# Altium PCB 2led_v2.PcbDoc (part 1 of 2)
Units mm, origin at the board's own origin, x right, y up, seen from the top; angles counter-clockwise.
Board outline 100 x 100 mm, 2 copper layers (Top Layer, Bottom Layer); 180 components, 8 nets, 419 pads, 0 vias.
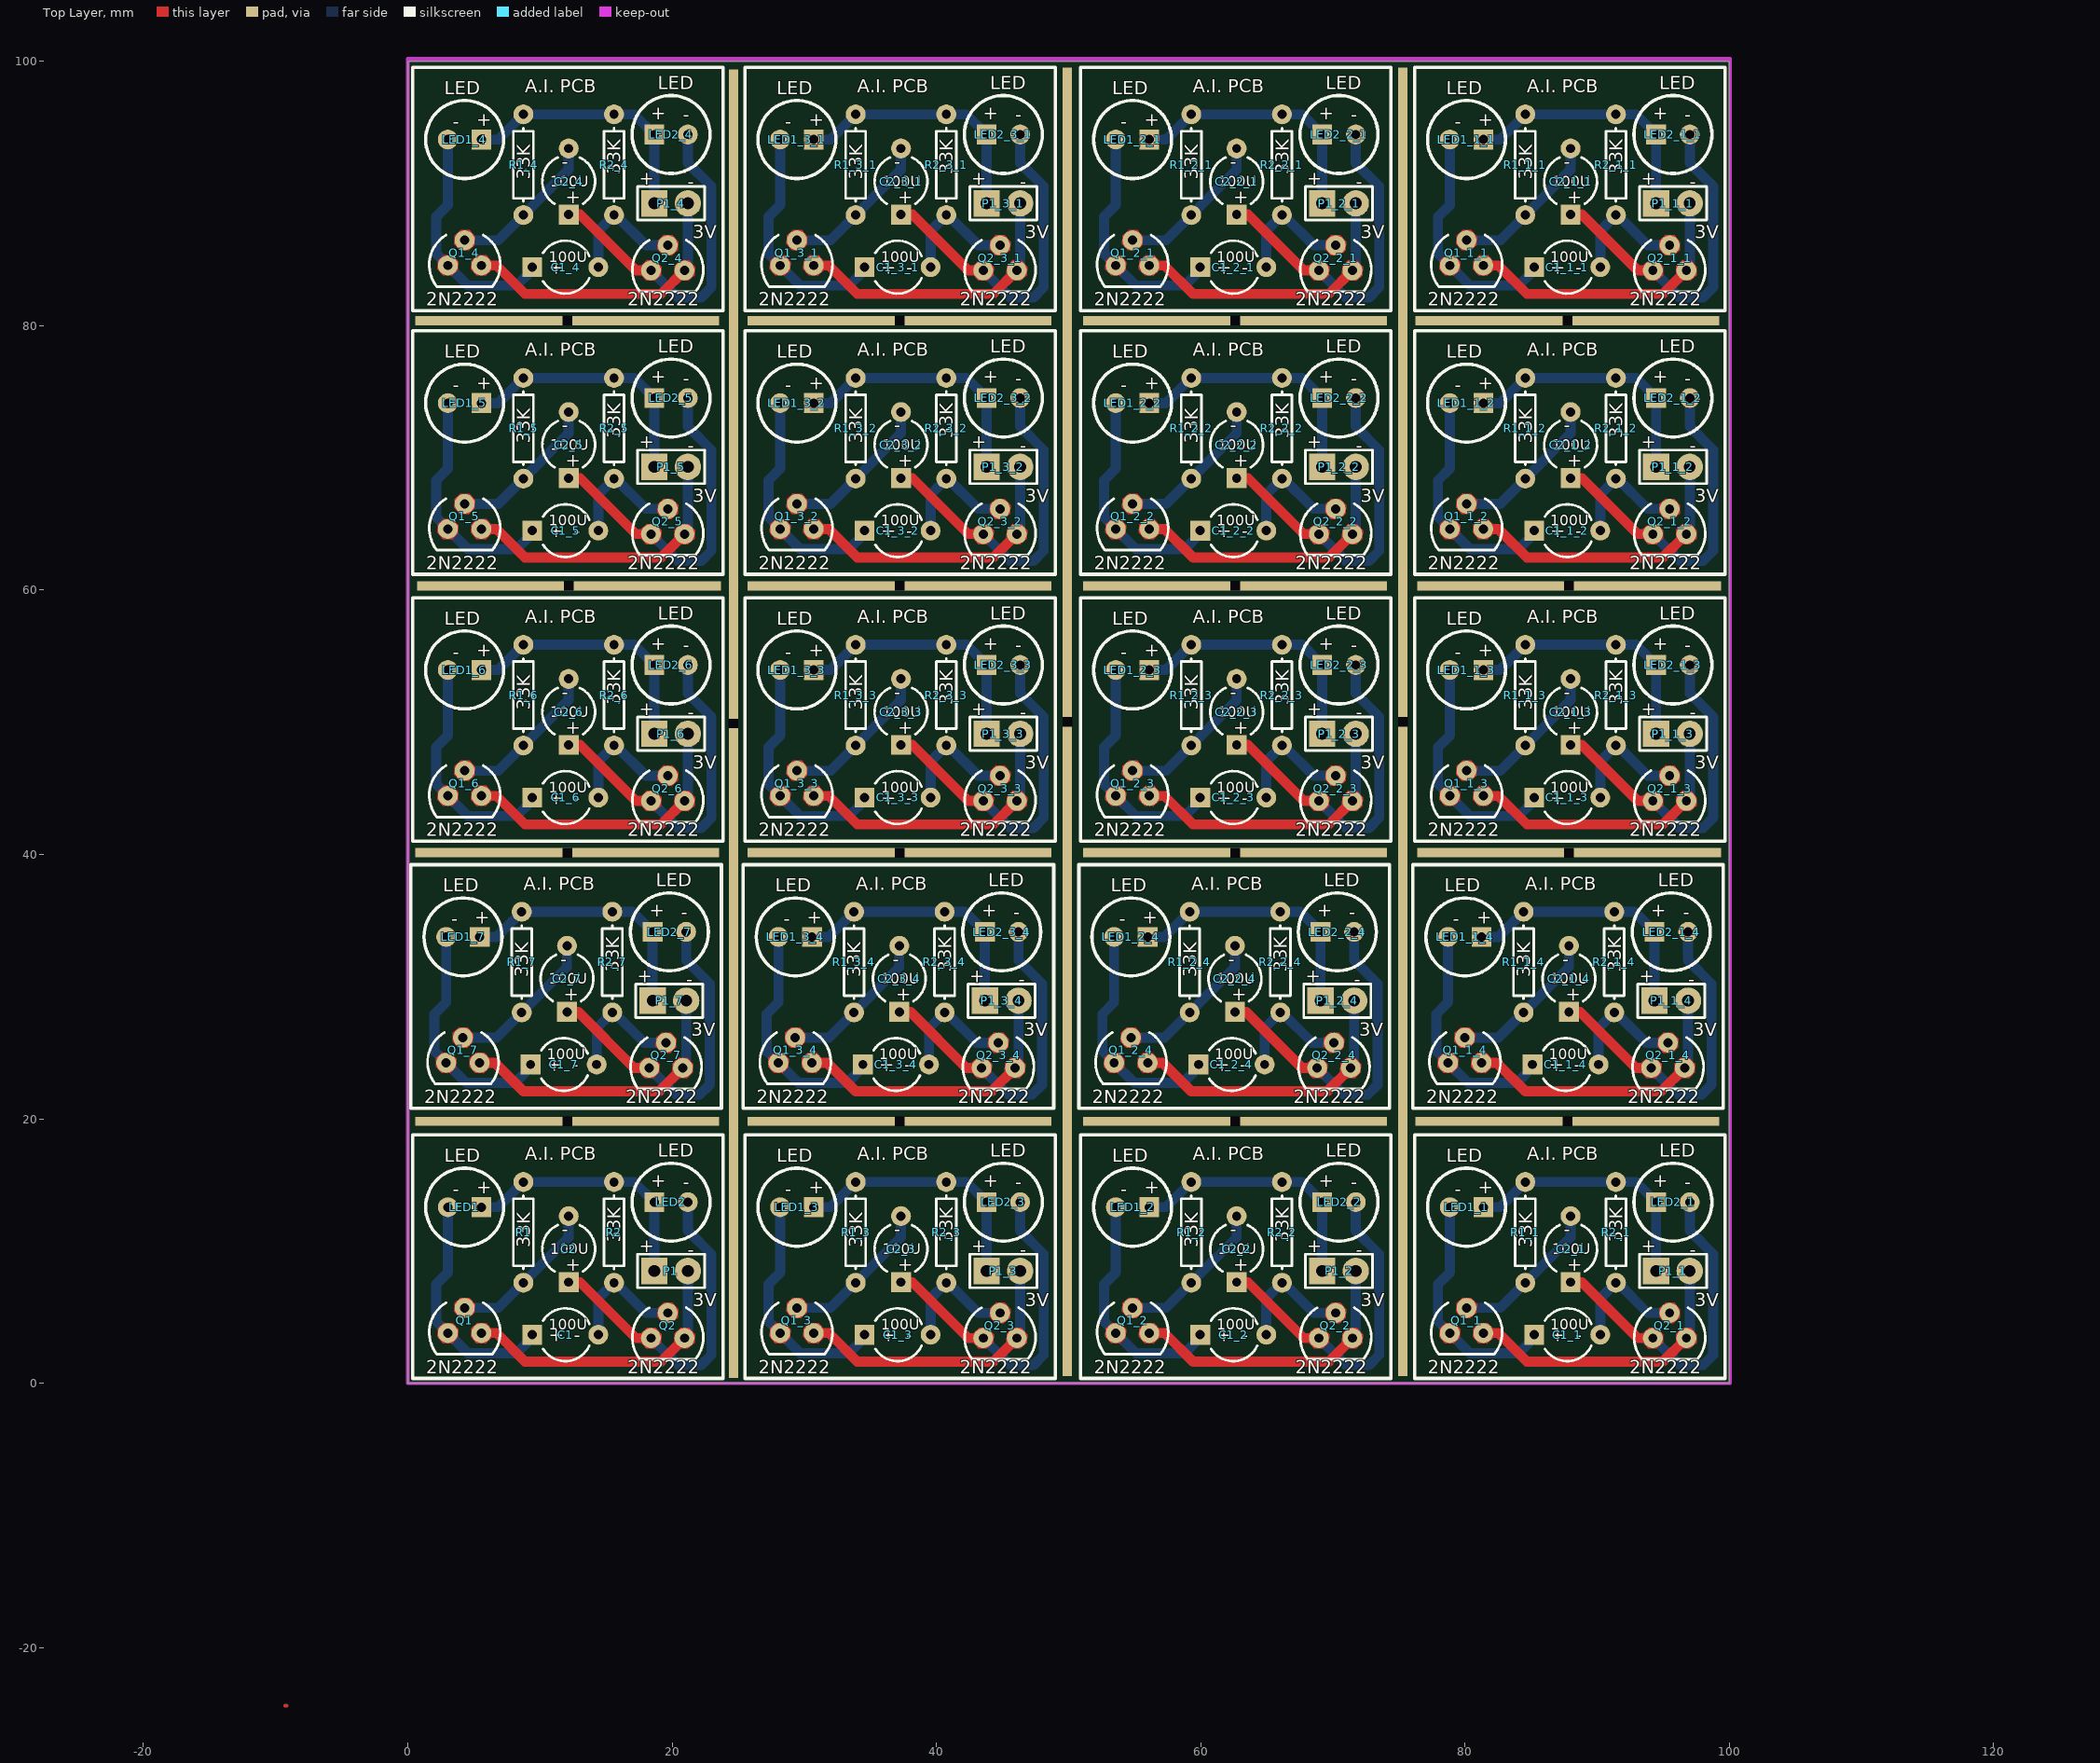
[diagram p0: Top Layer view]
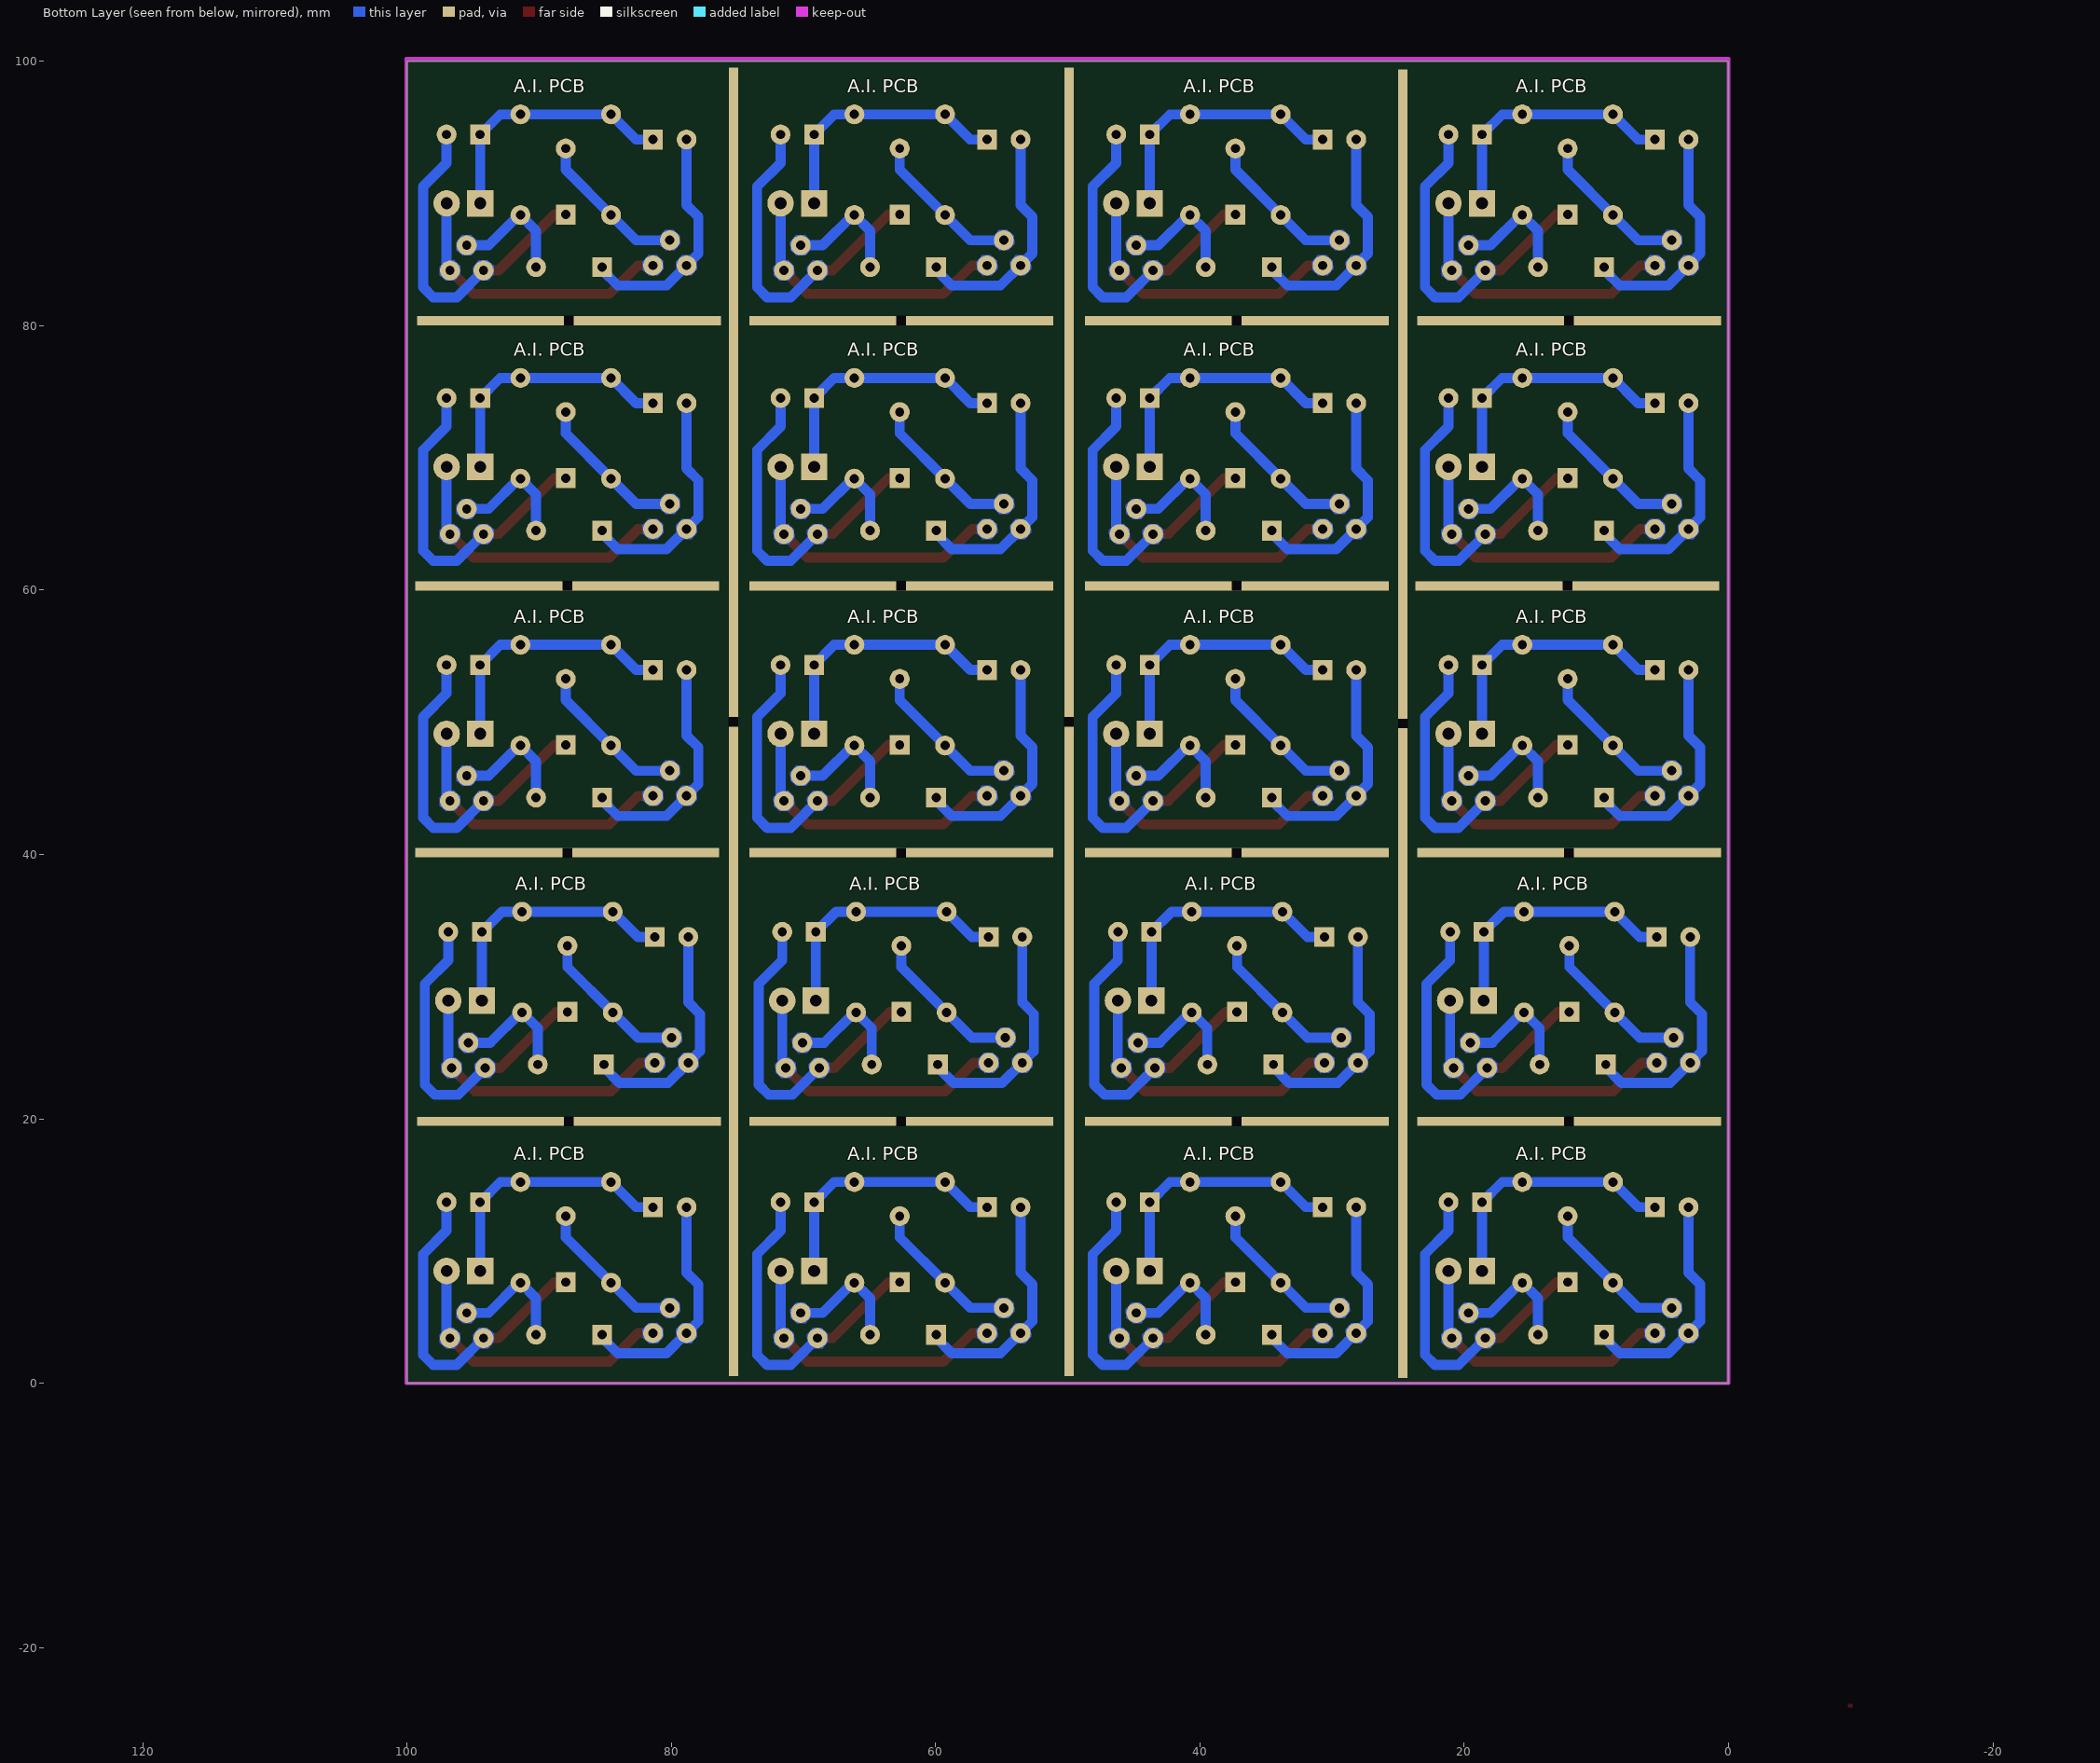
[diagram p1: Bottom Layer view, seen from below]

## Layer stack, top to bottom
Top Solder: solder mask 0.0102, Solder Resist, Dk 3.5
Top Layer: signal copper 0.0356
Dielectric 1: dielectric 0.32, FR-4, Dk 4.8
Bottom Layer: signal copper 0.0356
Bottom Solder: solder mask 0.0102, Solder Resist, Dk 3.5

## Board outline
0,0 0,100 100,100 100,0

## Design rules (kind name [scope] priority, off if disabled: settings)
Clearance [All] p1: gap=0.254 ignorepadtopadclearanceinfootprint=FALSE except(0: Arc-Hole Track-Hole SMDPad-Hole THPad-Hole Via-Hole Fill-Hole Poly-Hole Region-Hole Text-Hole)
PolygonConnect [All] p1: connectstyle=Relief reliefconductorwidth=0.254 reliefentries=4 polygonreliefangle="90 Angle" airgapwidth=0.254
RoutingVias [All] p1: holewidth=0.711 width=1.27 viastyle="Through Hole" minholewidth=0.711 minwidth=1.27 maxholewidth=0.711 maxwidth=1.27
SolderMaskExpansion [All] p1: expansion=0.102
Width [All] p1: maxlimit=0.762 minlimit=0.508 preferedwidth=0.762
30 further rules are at their usual default settings.

## Classes and differential pairs
component class Sheet1: C1 C2 LED1 LED2 P1 Q1 Q2 R1

## Components (designator, comment, footprint, x,y, rotation, side; value= is the part's Value field where it differs from the comment)
C1 "Cap1" CAPR5-4X5 11.922,3.667 r0 top value=100uF
C1_1 "Cap1" CAPR5-4X5 87.741,3.667 r0 top value=100uF (schematic designator C1)
C1_1_1 "Cap1" CAPR5-4X5 87.741,84.439 r0 top value=100uF (schematic designator C1)
C1_1_2 "Cap1" CAPR5-4X5 87.741,64.5 r0 top value=100uF (schematic designator C1)
C1_1_3 "Cap1" CAPR5-4X5 87.741,44.307 r0 top value=100uF (schematic designator C1)
C1_1_4 "Cap1" CAPR5-4X5 87.614,24.114 r0 top value=100uF (schematic designator C1)
C1_2 "Cap1" CAPR5-4X5 62.468,3.667 r0 top value=100uF (schematic designator C1)
C1_2_1 "Cap1" CAPR5-4X5 62.468,84.439 r0 top value=100uF (schematic designator C1)
C1_2_2 "Cap1" CAPR5-4X5 62.468,64.5 r0 top value=100uF (schematic designator C1)
C1_2_3 "Cap1" CAPR5-4X5 62.468,44.307 r0 top value=100uF (schematic designator C1)
C1_2_4 "Cap1" CAPR5-4X5 62.341,24.114 r0 top value=100uF (schematic designator C1)
C1_3 "Cap1" CAPR5-4X5 37.068,3.667 r0 top value=100uF (schematic designator C1)
C1_3_1 "Cap1" CAPR5-4X5 37.068,84.439 r0 top value=100uF (schematic designator C1)
C1_3_2 "Cap1" CAPR5-4X5 37.068,64.5 r0 top value=100uF (schematic designator C1)
C1_3_3 "Cap1" CAPR5-4X5 37.068,44.307 r0 top value=100uF (schematic designator C1)
C1_3_4 "Cap1" CAPR5-4X5 36.941,24.114 r0 top value=100uF (schematic designator C1)
C1_4 "Cap1" CAPR5-4X5 11.922,84.439 r0 top value=100uF (schematic designator C1)
C1_5 "Cap1" CAPR5-4X5 11.922,64.5 r0 top value=100uF (schematic designator C1)
C1_6 "Cap1" CAPR5-4X5 11.922,44.307 r0 top value=100uF (schematic designator C1)
C1_7 "Cap1" CAPR5-4X5 11.795,24.114 r0 top value=100uF (schematic designator C1)
C2 "Cap2" CAPR5-4X5 12.176,10.144 r90 top value=100uF
C2_1 "Cap2" CAPR5-4X5 87.995,10.144 r90 top value=100uF (schematic designator C2)
C2_1_1 "Cap2" CAPR5-4X5 87.995,90.916 r90 top value=100uF (schematic designator C2)
C2_1_2 "Cap2" CAPR5-4X5 87.995,70.977 r90 top value=100uF (schematic designator C2)
C2_1_3 "Cap2" CAPR5-4X5 87.995,50.784 r90 top value=100uF (schematic designator C2)
C2_1_4 "Cap2" CAPR5-4X5 87.868,30.591 r90 top value=100uF (schematic designator C2)
C2_2 "Cap2" CAPR5-4X5 62.722,10.144 r90 top value=100uF (schematic designator C2)
C2_2_1 "Cap2" CAPR5-4X5 62.722,90.916 r90 top value=100uF (schematic designator C2)
C2_2_2 "Cap2" CAPR5-4X5 62.722,70.977 r90 top value=100uF (schematic designator C2)
C2_2_3 "Cap2" CAPR5-4X5 62.722,50.784 r90 top value=100uF (schematic designator C2)
C2_2_4 "Cap2" CAPR5-4X5 62.595,30.591 r90 top value=100uF (schematic designator C2)
C2_3 "Cap2" CAPR5-4X5 37.322,10.144 r90 top value=100uF (schematic designator C2)
C2_3_1 "Cap2" CAPR5-4X5 37.322,90.916 r90 top value=100uF (schematic designator C2)
C2_3_2 "Cap2" CAPR5-4X5 37.322,70.977 r90 top value=100uF (schematic designator C2)
C2_3_3 "Cap2" CAPR5-4X5 37.322,50.784 r90 top value=100uF (schematic designator C2)
C2_3_4 "Cap2" CAPR5-4X5 37.195,30.591 r90 top value=100uF (schematic designator C2)
C2_4 "Cap2" CAPR5-4X5 12.176,90.916 r90 top value=100uF (schematic designator C2)
C2_5 "Cap2" CAPR5-4X5 12.176,70.977 r90 top value=100uF (schematic designator C2)
C2_6 "Cap2" CAPR5-4X5 12.176,50.784 r90 top value=100uF (schematic designator C2)
C2_7 "Cap2" CAPR5-4X5 12.049,30.591 r90 top value=100uF (schematic designator C2)
LED1 "L-53GD" L-53GD 4.302,13.319 r180 top
LED1_1 "L-53GD" L-53GD 80.121,13.319 r180 top (schematic designator LED1)
LED1_1_1 "L-53GD" L-53GD 80.121,94.091 r180 top (schematic designator LED1)
LED1_1_2 "L-53GD" L-53GD 80.121,74.152 r180 top (schematic designator LED1)
LED1_1_3 "L-53GD" L-53GD 80.121,53.959 r180 top (schematic designator LED1)
LED1_1_4 "L-53GD" L-53GD 79.994,33.766 r180 top (schematic designator LED1)
LED1_2 "L-53GD" L-53GD 54.848,13.319 r180 top (schematic designator LED1)
LED1_2_1 "L-53GD" L-53GD 54.848,94.091 r180 top (schematic designator LED1)
LED1_2_2 "L-53GD" L-53GD 54.848,74.152 r180 top (schematic designator LED1)
LED1_2_3 "L-53GD" L-53GD 54.848,53.959 r180 top (schematic designator LED1)
LED1_2_4 "L-53GD" L-53GD 54.721,33.766 r180 top (schematic designator LED1)
LED1_3 "L-53GD" L-53GD 29.448,13.319 r180 top (schematic designator LED1)
LED1_3_1 "L-53GD" L-53GD 29.448,94.091 r180 top (schematic designator LED1)
LED1_3_2 "L-53GD" L-53GD 29.448,74.152 r180 top (schematic designator LED1)
LED1_3_3 "L-53GD" L-53GD 29.448,53.959 r180 top (schematic designator LED1)
LED1_3_4 "L-53GD" L-53GD 29.321,33.766 r180 top (schematic designator LED1)
LED1_4 "L-53GD" L-53GD 4.302,94.091 r180 top (schematic designator LED1)
LED1_5 "L-53GD" L-53GD 4.302,74.152 r180 top (schematic designator LED1)
LED1_6 "L-53GD" L-53GD 4.302,53.959 r180 top (schematic designator LED1)
LED1_7 "L-53GD" L-53GD 4.175,33.766 r180 top (schematic designator LED1)
LED2 "L-53GD" L-53GD 19.923,13.7 r0 top
LED2_1 "L-53GD" L-53GD 95.742,13.7 r0 top (schematic designator LED2)
LED2_1_1 "L-53GD" L-53GD 95.742,94.472 r0 top (schematic designator LED2)
LED2_1_2 "L-53GD" L-53GD 95.742,74.533 r0 top (schematic designator LED2)
LED2_1_3 "L-53GD" L-53GD 95.742,54.34 r0 top (schematic designator LED2)
LED2_1_4 "L-53GD" L-53GD 95.615,34.147 r0 top (schematic designator LED2)
LED2_2 "L-53GD" L-53GD 70.469,13.7 r0 top (schematic designator LED2)
LED2_2_1 "L-53GD" L-53GD 70.469,94.472 r0 top (schematic designator LED2)
LED2_2_2 "L-53GD" L-53GD 70.469,74.533 r0 top (schematic designator LED2)
LED2_2_3 "L-53GD" L-53GD 70.469,54.34 r0 top (schematic designator LED2)
LED2_2_4 "L-53GD" L-53GD 70.342,34.147 r0 top (schematic designator LED2)
LED2_3 "L-53GD" L-53GD 45.069,13.7 r0 top (schematic designator LED2)
LED2_3_1 "L-53GD" L-53GD 45.069,94.472 r0 top (schematic designator LED2)
LED2_3_2 "L-53GD" L-53GD 45.069,74.533 r0 top (schematic designator LED2)
LED2_3_3 "L-53GD" L-53GD 45.069,54.34 r0 top (schematic designator LED2)
LED2_3_4 "L-53GD" L-53GD 44.942,34.147 r0 top (schematic designator LED2)
LED2_4 "L-53GD" L-53GD 19.923,94.472 r0 top (schematic designator LED2)
LED2_5 "L-53GD" L-53GD 19.923,74.533 r0 top (schematic designator LED2)
LED2_6 "L-53GD" L-53GD 19.923,54.34 r0 top (schematic designator LED2)
LED2_7 "L-53GD" L-53GD 19.796,34.147 r0 top (schematic designator LED2)
P1 "Header 2" HDR1X2 18.653,8.493 r0 top
P1_1 "Header 2" HDR1X2 94.472,8.493 r0 top (schematic designator P1)
P1_1_1 "Header 2" HDR1X2 94.472,89.265 r0 top (schematic designator P1)
P1_1_2 "Header 2" HDR1X2 94.472,69.326 r0 top (schematic designator P1)
P1_1_3 "Header 2" HDR1X2 94.472,49.133 r0 top (schematic designator P1)
P1_1_4 "Header 2" HDR1X2 94.345,28.94 r0 top (schematic designator P1)
P1_2 "Header 2" HDR1X2 69.199,8.493 r0 top (schematic designator P1)
P1_2_1 "Header 2" HDR1X2 69.199,89.265 r0 top (schematic designator P1)
P1_2_2 "Header 2" HDR1X2 69.199,69.326 r0 top (schematic designator P1)
P1_2_3 "Header 2" HDR1X2 69.199,49.133 r0 top (schematic designator P1)
P1_2_4 "Header 2" HDR1X2 69.072,28.94 r0 top (schematic designator P1)
P1_3 "Header 2" HDR1X2 43.799,8.493 r0 top (schematic designator P1)
P1_3_1 "Header 2" HDR1X2 43.799,89.265 r0 top (schematic designator P1)
P1_3_2 "Header 2" HDR1X2 43.799,69.326 r0 top (schematic designator P1)
P1_3_3 "Header 2" HDR1X2 43.799,49.133 r0 top (schematic designator P1)
P1_3_4 "Header 2" HDR1X2 43.672,28.94 r0 top (schematic designator P1)
P1_4 "Header 2" HDR1X2 18.653,89.265 r0 top (schematic designator P1)
P1_5 "Header 2" HDR1X2 18.653,69.326 r0 top (schematic designator P1)
P1_6 "Header 2" HDR1X2 18.653,49.133 r0 top (schematic designator P1)
P1_7 "Header 2" HDR1X2 18.526,28.94 r0 top (schematic designator P1)
Q1 "P2N2222A" *TO92 4.302,3.794 r0 top
Q1_1 "P2N2222A" *TO92 80.121,3.794 r0 top (schematic designator Q1)
Q1_1_1 "P2N2222A" *TO92 80.121,84.566 r0 top (schematic designator Q1)
Q1_1_2 "P2N2222A" *TO92 80.121,64.627 r0 top (schematic designator Q1)
Q1_1_3 "P2N2222A" *TO92 80.121,44.434 r0 top (schematic designator Q1)
Q1_1_4 "P2N2222A" *TO92 79.994,24.241 r0 top (schematic designator Q1)
Q1_2 "P2N2222A" *TO92 54.848,3.794 r0 top (schematic designator Q1)
Q1_2_1 "P2N2222A" *TO92 54.848,84.566 r0 top (schematic designator Q1)
Q1_2_2 "P2N2222A" *TO92 54.848,64.627 r0 top (schematic designator Q1)
Q1_2_3 "P2N2222A" *TO92 54.848,44.434 r0 top (schematic designator Q1)
Q1_2_4 "P2N2222A" *TO92 54.721,24.241 r0 top (schematic designator Q1)
Q1_3 "P2N2222A" *TO92 29.448,3.794 r0 top (schematic designator Q1)
Q1_3_1 "P2N2222A" *TO92 29.448,84.566 r0 top (schematic designator Q1)
Q1_3_2 "P2N2222A" *TO92 29.448,64.627 r0 top (schematic designator Q1)
Q1_3_3 "P2N2222A" *TO92 29.448,44.434 r0 top (schematic designator Q1)
Q1_3_4 "P2N2222A" *TO92 29.321,24.241 r0 top (schematic designator Q1)
Q1_4 "P2N2222A" *TO92 4.302,84.566 r0 top (schematic designator Q1)
Q1_5 "P2N2222A" *TO92 4.302,64.627 r0 top (schematic designator Q1)
Q1_6 "P2N2222A" *TO92 4.302,44.434 r0 top (schematic designator Q1)
Q1_7 "P2N2222A" *TO92 4.175,24.241 r0 top (schematic designator Q1)
Q2 "P2N2222A" *TO92 19.669,3.413 r0 top
Q2_1 "P2N2222A" *TO92 95.488,3.413 r0 top (schematic designator Q2)
Q2_1_1 "P2N2222A" *TO92 95.488,84.185 r0 top (schematic designator Q2)
Q2_1_2 "P2N2222A" *TO92 95.488,64.246 r0 top (schematic designator Q2)
Q2_1_3 "P2N2222A" *TO92 95.488,44.053 r0 top (schematic designator Q2)
Q2_1_4 "P2N2222A" *TO92 95.361,23.86 r0 top (schematic designator Q2)
Q2_2 "P2N2222A" *TO92 70.215,3.413 r0 top (schematic designator Q2)
Q2_2_1 "P2N2222A" *TO92 70.215,84.185 r0 top (schematic designator Q2)
Q2_2_2 "P2N2222A" *TO92 70.215,64.246 r0 top (schematic designator Q2)
Q2_2_3 "P2N2222A" *TO92 70.215,44.053 r0 top (schematic designator Q2)
Q2_2_4 "P2N2222A" *TO92 70.088,23.86 r0 top (schematic designator Q2)
Q2_3 "P2N2222A" *TO92 44.815,3.413 r0 top (schematic designator Q2)
Q2_3_1 "P2N2222A" *TO92 44.815,84.185 r0 top (schematic designator Q2)
Q2_3_2 "P2N2222A" *TO92 44.815,64.246 r0 top (schematic designator Q2)
Q2_3_3 "P2N2222A" *TO92 44.815,44.053 r0 top (schematic designator Q2)
Q2_3_4 "P2N2222A" *TO92 44.688,23.86 r0 top (schematic designator Q2)
Q2_4 "P2N2222A" *TO92 19.669,84.185 r0 top (schematic designator Q2)
Q2_5 "P2N2222A" *TO92 19.669,64.246 r0 top (schematic designator Q2)
Q2_6 "P2N2222A" *TO92 19.669,44.053 r0 top (schematic designator Q2)
Q2_7 "P2N2222A" *TO92 19.542,23.86 r0 top (schematic designator Q2)
R1 "Res1" AXIAL-0.3 8.747,11.414 r90 top value=33K
R1_1 "Res1" AXIAL-0.3 84.566,11.414 r90 top value=33K (schematic designator R1)
R1_1_1 "Res1" AXIAL-0.3 84.566,92.186 r90 top value=33K (schematic designator R1)
R1_1_2 "Res1" AXIAL-0.3 84.566,72.247 r90 top value=33K (schematic designator R1)
R1_1_3 "Res1" AXIAL-0.3 84.566,52.054 r90 top value=33K (schematic designator R1)
R1_1_4 "Res1" AXIAL-0.3 84.439,31.861 r90 top value=33K (schematic designator R1)
R1_2 "Res1" AXIAL-0.3 59.293,11.414 r90 top value=33K (schematic designator R1)
R1_2_1 "Res1" AXIAL-0.3 59.293,92.186 r90 top value=33K (schematic designator R1)
R1_2_2 "Res1" AXIAL-0.3 59.293,72.247 r90 top value=33K (schematic designator R1)
R1_2_3 "Res1" AXIAL-0.3 59.293,52.054 r90 top value=33K (schematic designator R1)
R1_2_4 "Res1" AXIAL-0.3 59.166,31.861 r90 top value=33K (schematic designator R1)
R1_3 "Res1" AXIAL-0.3 33.893,11.414 r90 top value=33K (schematic designator R1)
R1_3_1 "Res1" AXIAL-0.3 33.893,92.186 r90 top value=33K (schematic designator R1)
R1_3_2 "Res1" AXIAL-0.3 33.893,72.247 r90 top value=33K (schematic designator R1)
R1_3_3 "Res1" AXIAL-0.3 33.893,52.054 r90 top value=33K (schematic designator R1)
R1_3_4 "Res1" AXIAL-0.3 33.766,31.861 r90 top value=33K (schematic designator R1)
R1_4 "Res1" AXIAL-0.3 8.747,92.186 r90 top value=33K (schematic designator R1)
R1_5 "Res1" AXIAL-0.3 8.747,72.247 r90 top value=33K (schematic designator R1)
R1_6 "Res1" AXIAL-0.3 8.747,52.054 r90 top value=33K (schematic designator R1)
R1_7 "Res1" AXIAL-0.3 8.62,31.861 r90 top value=33K (schematic designator R1)
R2 "Res1" AXIAL-0.3 15.605,11.414 r90 top value=33K
R2_1 "Res1" AXIAL-0.3 91.424,11.414 r90 top value=33K (schematic designator R2)
R2_1_1 "Res1" AXIAL-0.3 91.424,92.186 r90 top value=33K (schematic designator R2)
R2_1_2 "Res1" AXIAL-0.3 91.424,72.247 r90 top value=33K (schematic designator R2)
R2_1_3 "Res1" AXIAL-0.3 91.424,52.054 r90 top value=33K (schematic designator R2)
R2_1_4 "Res1" AXIAL-0.3 91.297,31.861 r90 top value=33K (schematic designator R2)
R2_2 "Res1" AXIAL-0.3 66.151,11.414 r90 top value=33K (schematic designator R2)
R2_2_1 "Res1" AXIAL-0.3 66.151,92.186 r90 top value=33K (schematic designator R2)
R2_2_2 "Res1" AXIAL-0.3 66.151,72.247 r90 top value=33K (schematic designator R2)
R2_2_3 "Res1" AXIAL-0.3 66.151,52.054 r90 top value=33K (schematic designator R2)
R2_2_4 "Res1" AXIAL-0.3 66.024,31.861 r90 top value=33K (schematic designator R2)
R2_3 "Res1" AXIAL-0.3 40.751,11.414 r90 top value=33K (schematic designator R2)
R2_3_1 "Res1" AXIAL-0.3 40.751,92.186 r90 top value=33K (schematic designator R2)
R2_3_2 "Res1" AXIAL-0.3 40.751,72.247 r90 top value=33K (schematic designator R2)
R2_3_3 "Res1" AXIAL-0.3 40.751,52.054 r90 top value=33K (schematic designator R2)
R2_3_4 "Res1" AXIAL-0.3 40.624,31.861 r90 top value=33K (schematic designator R2)
R2_4 "Res1" AXIAL-0.3 15.605,92.186 r90 top value=33K (schematic designator R2)
R2_5 "Res1" AXIAL-0.3 15.605,72.247 r90 top value=33K (schematic designator R2)
R2_6 "Res1" AXIAL-0.3 15.605,52.054 r90 top value=33K (schematic designator R2)
R2_7 "Res1" AXIAL-0.3 15.478,31.861 r90 top value=33K (schematic designator R2)

## Footprints (in the part's own frame and the unit in brackets; to place one, negate y for a bottom-side part, rotate by r counter-clockwise, add the part's x,y. Pads: shape width x height; smd on the part's side, far side on the other; paste and mask are expansions set on the pad)
*TO92 [mm]
  round 1.5 hole 0.7: 1(1.27,0) 2(0,1.905) 3(-1.27,0)
  Top Layer region: 2.058,0.287 1.624,0.76 0.983,0.788 0.51,0.354 0.482,-0.287 0.916,-0.76 1.557,-0.788 2.03,-0.354
  Top Layer region: 0.788,2.192 0.354,2.665 -0.287,2.693 -0.76,2.259 -0.788,1.618 -0.354,1.145 0.287,1.117 0.76,1.551
  Top Layer region: -0.482,0.287 -0.916,0.76 -1.557,0.788 -2.03,0.354 -2.058,-0.287 -1.624,-0.76 -0.983,-0.788 -0.51,-0.354
  Bottom Layer region: 2.058,0.287 1.624,0.76 0.983,0.788 0.51,0.354 0.482,-0.287 0.916,-0.76 1.557,-0.788 2.03,-0.354
  Bottom Layer region: 0.788,2.192 0.354,2.665 -0.287,2.693 -0.76,2.259 -0.788,1.618 -0.354,1.145 0.287,1.117 0.76,1.551
  Bottom Layer region: -0.482,0.287 -0.916,0.76 -1.557,0.788 -2.03,0.354 -2.058,-0.287 -1.624,-0.76 -0.983,-0.788 -0.51,-0.354
  Multi-Layer region: 2.058,0.287 1.624,0.76 0.983,0.788 0.51,0.354 0.482,-0.287 0.916,-0.76 1.557,-0.788 2.03,-0.354
  Multi-Layer region: 0.788,2.192 0.354,2.665 -0.287,2.693 -0.76,2.259 -0.788,1.618 -0.354,1.145 0.287,1.117 0.76,1.551
  Multi-Layer region: -0.482,0.287 -0.916,0.76 -1.557,0.788 -2.03,0.354 -2.058,-0.287 -1.624,-0.76 -0.983,-0.788 -0.51,-0.354
  silkscreen extent -2.68,-1.61 2.7,2.3
AXIAL-0.3 [mm] "Axial Device, Thru-Hole; 2 Leads; 0.3 in Pin Spacing"
  round 1.5 hole 0.7: 1(-3.81,0) 2(3.81,0)
  silkscreen extent -2.77,-0.76 2.77,0.76
CAPR5-4X5 [mm] "Capacitor; 2 Leads"
  rect 1.5x1.5 hole 0.7: 1(-2.5,0)
  round 1.5 hole 0.7: 2(2.5,0)
  silkscreen extent -1.69,-2 1.82,2
HDR1X2 [mm] "Connector; Header; 2 Position"
  rect 2x2 hole 0.9: 1(0,0)
  round 2 hole 0.9: 2(2.54,0)
  silkscreen extent -1.27,-1.27 3.81,1.27
L-53GD [mm]
  rect 1.5x1.5 hole 0.7: 1(-1.27,0)
  round 1.5 hole 0.7: 2(1.27,0)
  silkscreen extent -2.95,-2.95 2.95,2.95

## Part data
C1 C1_1 C1_1_1 C1_1_2 C1_1_3 C1_1_4 C1_2 C1_2_1 C1_2_2 C1_2_3 C1_2_4 C1_3 C1_3_1 C1_3_2 C1_3_3 C1_3_4 C1_4 C1_5 C1_6 C1_7: library part Cap2, "Capacitor", PackageDescription="Capacitor; 2 Leads", PackageReference=CAPR5-4X5, Published=23-Sep-2002, Publisher="Altium Limited"
C2 C2_1 C2_1_1 C2_1_2 C2_1_3 C2_1_4 C2_2 C2_2_1 C2_2_2 C2_2_3 C2_2_4 C2_3 C2_3_1 C2_3_2 C2_3_3 C2_3_4 C2_4 C2_5 C2_6 C2_7: "Capacitor", PackageDescription="Capacitor; 2 Leads", PackageReference=CAPR5-4X5, Published=23-Sep-2002, Publisher="Altium Limited"
LED1 LED1_1 LED1_1_1 LED1_1_2 LED1_1_3 LED1_1_4 LED1_2 LED1_2_1 LED1_2_2 LED1_2_3 LED1_2_4 LED1_3 LED1_3_1 LED1_3_2 LED1_3_3 LED1_3_4 LED1_4 LED1_5 LED1_6 LED1_7 LED2 LED2_1 LED2_1_1 LED2_1_2 LED2_1_3 LED2_1_4 LED2_2 LED2_2_1 LED2_2_2 LED2_2_3 LED2_2_4 LED2_3 LED2_3_1 LED2_3_2 LED2_3_3 LED2_3_4 LED2_4 LED2_5 LED2_6 LED2_7: "LED", Manufacturer_Name=Kingbright, Mouser Part Number=N/A, RS Part Number=2286004A, Allied_Number=70424261, Allied Price/Stock=http://www.alliedelec.com/kingbright-l-53gd/70424261/, Datasheet Link=http://docs-emea.rs-online.com/webdocs/151e/0900766b8151e408.pdf, Manufacturer_Part_Number=L-53GD, Mouser Price/Stock=https://www.mouser.com/Search/Refine.aspx?Keyword=N%2FA, RS Price/Stock=http://uk.rs-online.com/web/p/products/2286004A
P1 P1_1 P1_1_1 P1_1_2 P1_1_3 P1_1_4 P1_2 P1_2_1 P1_2_2 P1_2_3 P1_2_4 P1_3 P1_3_1 P1_3_2 P1_3_3 P1_3_4 P1_4 P1_5 P1_6 P1_7: "Header, 2-Pin", LatestRevisionDate=17-Jul-2002, LatestRevisionNote="Re-released for DXP Platform.", Publisher="Altium Limited"
Q1 Q1_1 Q1_1_1 Q1_1_2 Q1_1_3 Q1_1_4 Q1_2 Q1_2_1 Q1_2_2 Q1_2_3 Q1_2_4 Q1_3 Q1_3_1 Q1_3_2 Q1_3_3 Q1_3_4 Q1_4 Q1_5 Q1_6 Q1_7 Q2 Q2_1 Q2_1_1 Q2_1_2 Q2_1_3 Q2_1_4 Q2_2 Q2_2_1 Q2_2_2 Q2_2_3 Q2_2_4 Q2_3 Q2_3_1 Q2_3_2 Q2_3_3 Q2_3_4 Q2_4 Q2_5 Q2_6 Q2_7: Package="TO-92 NXP Semiconductors", Availability=Unavailable, MF="ON Semiconductor", MP=P2N2222A, Price=None, SnapEDA_Link=https://www.snapeda.com/parts/P2N2222A/ON%20Semiconductor/view-part/?ref=snap
R1 R1_1 R1_1_1 R1_1_2 R1_1_3 R1_1_4 R1_2 R1_2_1 R1_2_2 R1_2_3 R1_2_4 R1_3 R1_3_1 R1_3_2 R1_3_3 R1_3_4 R1_4 R1_5 R1_6 R1_7 R2 R2_1 R2_1_1 R2_1_2 R2_1_3 R2_1_4 R2_2 R2_2_1 R2_2_2 R2_2_3 R2_2_4 R2_3 R2_3_1 R2_3_2 R2_3_3 R2_3_4 R2_4 R2_5 R2_6 R2_7: "Resistor", LatestRevisionDate=17-Jul-2002, LatestRevisionNote="Re-released for DXP Platform.", PackageDescription="Axial Device, Thru-Hole; 2 Leads; 0.3 in Pin Spacing", PackageReference=AXIAL-0.3, Published=8-Jun-2000, Publisher="Altium Limited"

## Free pads (board coordinates)
  rect 0.7x99 hole 0.7 square: 7(24.638,49.911) 7(49.911,50.038) 7(75.311,50.038)
  rect 23x0.7 hole 0.7 square: 8(12.065,19.812) 8(12.065,40.132) 8(12.065,80.391) 8(12.192,60.325) 8(37.211,19.812) 8(37.211,40.132) 8(37.211,60.325) 8(37.211,80.391) 8(62.611,19.812) 8(62.611,40.132) 8(62.611,60.325) 8(62.611,80.391) 8(87.757,19.812) 8(87.757,80.391) 8(87.884,40.132) 8(87.884,60.325)

## Nets (pads, with @x,y where several pads share a name; then routed paths per layer and width w, separated by ;. In a path a pad name is that pad's centre, name@x,y a point inside that pad or via, vN(x,y) a via of type N, cw(c..) or ccw(c..) an arc to the next point about the centre after c; other vN are vias at no path point)
NetC1_1: C1.1 LED1.2 Q1.3 | length 18
  Bottom Layer w0.762: LED1.2@3.032,13.319 3.032,8.366 2.143,7.477 2.143,4.683 Q1.3@3.032,3.794 4.556,2.27 8.239,2.27 9.422,3.453 C1.1@9.422,3.667
NetC1_2: C1.2 Q2.2 R2.1 | length 9.4
  Bottom Layer w0.762: C1.2@14.422,3.667 14.422,6.421 R2.1@15.605,7.604 15.732,7.604 18.018,5.318 Q2.2@19.669,5.318
NetC2_1: C2.1 LED2.2 Q2.3 | length 26
  Top Layer w0.762: C2.1@12.176,7.644 13.025,7.644 17.256,3.413 Q2.3@18.399,3.413
  Bottom Layer w0.762: Q2.3@18.399,3.413 20.431,1.381 22.209,1.381 22.971,2.143 22.971,9.763 21.193,11.541 LED2.2@21.193,13.7
NetC2_2: C2.2 Q1.2 R1.1 | length 11.7
  Bottom Layer w0.762: Q1.2@4.302,5.699 6.842,5.699 R1.1@8.747,7.604 12.176,11.033 C2.2@12.176,12.644
NetLED1_1: LED1.1 LED2.1 P1.1 R1.2 R2.2 | length 19.7
  Bottom Layer w0.762: LED1.1@5.572,13.319 6.842,13.319 R1.2@8.747,15.224 R2.2@15.605,15.224 17.129,15.224 LED2.1@18.653,13.7 P1.1@18.653,8.493
NetLED4_1: 
NetLED4_2: 
NetP1_2: P1.2 Q1.1 Q2.1 | length 22.2
  Top Layer w0.762: Q1.1@5.572,3.794 6.715,3.794 8.874,1.635 19.161,1.635 Q2.1@20.939,3.413
  Bottom Layer w0.762: Q2.1@20.939,3.413 21.193,3.667 P1.2@21.193,8.493
pads on no net: C1_1.1 C1_1.2 C1_1_1.1 C1_1_1.2 C1_1_2.1 C1_1_2.2 C1_1_3.1 C1_1_3.2 C1_1_4.1 C1_1_4.2 C1_2.1 C1_2.2 C1_2_1.1 C1_2_1.2 C1_2_2.1 C1_2_2.2 C1_2_3.1 C1_2_3.2 C1_2_4.1 C1_2_4.2 C1_3.1 C1_3.2 C1_3_1.1 C1_3_1.2 C1_3_2.1 C1_3_2.2 C1_3_3.1 C1_3_3.2 C1_3_4.1 C1_3_4.2 C1_4.1 C1_4.2 C1_5.1 C1_5.2 C1_6.1 C1_6.2 C1_7.1 C1_7.2 C2_1.1 C2_1.2 C2_1_1.1 C2_1_1.2 C2_1_2.1 C2_1_2.2 C2_1_3.1 C2_1_3.2 C2_1_4.1 C2_1_4.2 C2_2.1 C2_2.2 C2_2_1.1 C2_2_1.2 C2_2_2.1 C2_2_2.2 C2_2_3.1 C2_2_3.2 C2_2_4.1 C2_2_4.2 C2_3.1 C2_3.2 C2_3_1.1 C2_3_1.2 C2_3_2.1 C2_3_2.2 C2_3_3.1 C2_3_3.2 C2_3_4.1 C2_3_4.2 C2_4.1 C2_4.2 C2_5.1 C2_5.2 C2_6.1 C2_6.2 C2_7.1 C2_7.2 LED1_1.1 LED1_1.2 LED1_1_1.1 LED1_1_1.2 LED1_1_2.1 LED1_1_2.2 LED1_1_3.1 LED1_1_3.2 LED1_1_4.1 LED1_1_4.2 LED1_2.1 LED1_2.2 LED1_2_1.1 LED1_2_1.2 LED1_2_2.1 LED1_2_2.2 LED1_2_3.1 LED1_2_3.2 LED1_2_4.1 LED1_2_4.2 LED1_3.1 LED1_3.2 LED1_3_1.1 LED1_3_1.2 LED1_3_2.1 LED1_3_2.2 LED1_3_3.1 LED1_3_3.2 LED1_3_4.1 LED1_3_4.2 LED1_4.1 LED1_4.2 LED1_5.1 LED1_5.2 LED1_6.1 LED1_6.2 LED1_7.1 LED1_7.2 LED2_1.1 LED2_1.2 LED2_1_1.1 LED2_1_1.2 LED2_1_2.1 LED2_1_2.2 LED2_1_3.1 LED2_1_3.2 LED2_1_4.1 LED2_1_4.2 LED2_2.1 LED2_2.2 LED2_2_1.1 LED2_2_1.2 LED2_2_2.1 LED2_2_2.2 LED2_2_3.1 LED2_2_3.2 LED2_2_4.1 LED2_2_4.2 LED2_3.1 LED2_3.2 LED2_3_1.1 LED2_3_1.2 LED2_3_2.1 LED2_3_2.2 LED2_3_3.1 LED2_3_3.2 LED2_3_4.1 LED2_3_4.2 LED2_4.1 LED2_4.2 LED2_5.1 LED2_5.2 LED2_6.1 LED2_6.2 LED2_7.1 LED2_7.2 P1_1.1 P1_1.2 P1_1_1.1 P1_1_1.2 P1_1_2.1 P1_1_2.2 P1_1_3.1 P1_1_3.2 P1_1_4.1 P1_1_4.2 P1_2.1 P1_2.2 P1_2_1.1 P1_2_1.2 P1_2_2.1 P1_2_2.2 P1_2_3.1 P1_2_3.2 P1_2_4.1 P1_2_4.2 P1_3.1 P1_3.2 P1_3_1.1 P1_3_1.2 P1_3_2.1 P1_3_2.2 P1_3_3.1 P1_3_3.2 P1_3_4.1 P1_3_4.2 P1_4.1 P1_4.2 P1_5.1 P1_5.2 P1_6.1 P1_6.2 P1_7.1 P1_7.2 Q1_1.1 Q1_1.2 Q1_1.3 Q1_1_1.1 Q1_1_1.2 Q1_1_1.3 Q1_1_2.1 Q1_1_2.2 Q1_1_2.3 Q1_1_3.1 Q1_1_3.2 Q1_1_3.3 Q1_1_4.1 Q1_1_4.2 Q1_1_4.3 Q1_2.1 Q1_2.2 Q1_2.3 Q1_2_1.1 Q1_2_1.2 Q1_2_1.3 Q1_2_2.1 Q1_2_2.2 Q1_2_2.3 Q1_2_3.1 Q1_2_3.2 Q1_2_3.3 Q1_2_4.1 Q1_2_4.2 Q1_2_4.3 Q1_3.1 Q1_3.2 Q1_3.3 Q1_3_1.1 Q1_3_1.2 Q1_3_1.3 Q1_3_2.1 Q1_3_2.2 Q1_3_2.3 Q1_3_3.1 Q1_3_3.2 Q1_3_3.3 Q1_3_4.1 Q1_3_4.2 Q1_3_4.3 Q1_4.1 Q1_4.2 Q1_4.3 Q1_5.1 Q1_5.2 Q1_5.3 Q1_6.1 Q1_6.2 Q1_6.3 Q1_7.1 Q1_7.2 Q1_7.3 Q2_1.1 Q2_1.2 Q2_1.3 Q2_1_1.1 Q2_1_1.2 Q2_1_1.3 Q2_1_2.1 Q2_1_2.2 Q2_1_2.3 Q2_1_3.1 Q2_1_3.2 Q2_1_3.3 Q2_1_4.1 Q2_1_4.2 Q2_1_4.3 Q2_2.1 Q2_2.2 Q2_2.3 Q2_2_1.1 Q2_2_1.2 Q2_2_1.3 Q2_2_2.1 Q2_2_2.2 Q2_2_2.3 Q2_2_3.1 Q2_2_3.2 Q2_2_3.3 Q2_2_4.1 Q2_2_4.2 Q2_2_4.3 Q2_3.1 Q2_3.2 Q2_3.3 Q2_3_1.1 Q2_3_1.2 Q2_3_1.3 Q2_3_2.1 Q2_3_2.2 Q2_3_2.3 Q2_3_3.1 Q2_3_3.2 Q2_3_3.3 Q2_3_4.1 Q2_3_4.2 Q2_3_4.3 Q2_4.1 Q2_4.2 Q2_4.3 Q2_5.1 Q2_5.2 Q2_5.3 Q2_6.1 Q2_6.2 Q2_6.3 Q2_7.1 Q2_7.2 Q2_7.3 R1_1.1 R1_1.2 R1_1_1.1 R1_1_1.2 R1_1_2.1 R1_1_2.2 R1_1_3.1 R1_1_3.2 R1_1_4.1 R1_1_4.2 R1_2.1 R1_2.2 R1_2_1.1 R1_2_1.2 R1_2_2.1 R1_2_2.2 R1_2_3.1 R1_2_3.2 R1_2_4.1 R1_2_4.2 R1_3.1 R1_3.2 R1_3_1.1 R1_3_1.2 R1_3_2.1 R1_3_2.2 R1_3_3.1 R1_3_3.2 R1_3_4.1 R1_3_4.2 R1_4.1 R1_4.2 R1_5.1 R1_5.2 R1_6.1 R1_6.2 R1_7.1 R1_7.2 R2_1.1 R2_1.2 R2_1_1.1 R2_1_1.2 R2_1_2.1 R2_1_2.2 R2_1_3.1 R2_1_3.2 R2_1_4.1 R2_1_4.2 R2_2.1 R2_2.2 R2_2_1.1 R2_2_1.2 R2_2_2.1 R2_2_2.2 R2_2_3.1 R2_2_3.2 R2_2_4.1 R2_2_4.2 R2_3.1 R2_3.2 R2_3_1.1 R2_3_1.2 R2_3_2.1 R2_3_2.2 R2_3_3.1 R2_3_3.2 R2_3_4.1 R2_3_4.2 R2_4.1 R2_4.2 R2_5.1 R2_5.2 R2_6.1 R2_6.2 R2_7.1 R2_7.2